# Altium PCB SPDIF_I2S_SPDIF_04-20-23.PcbDoc (part 1 of 2)
Units mil, origin at the board's own origin, x right, y up, seen from the top; angles counter-clockwise.
Board outline 3987 x 3094 mil, 2 copper layers (Top Layer, Bottom Layer); 173 components, 89 nets, 568 pads, 369 vias.
Unrouted connection lines stored in the file: 53.
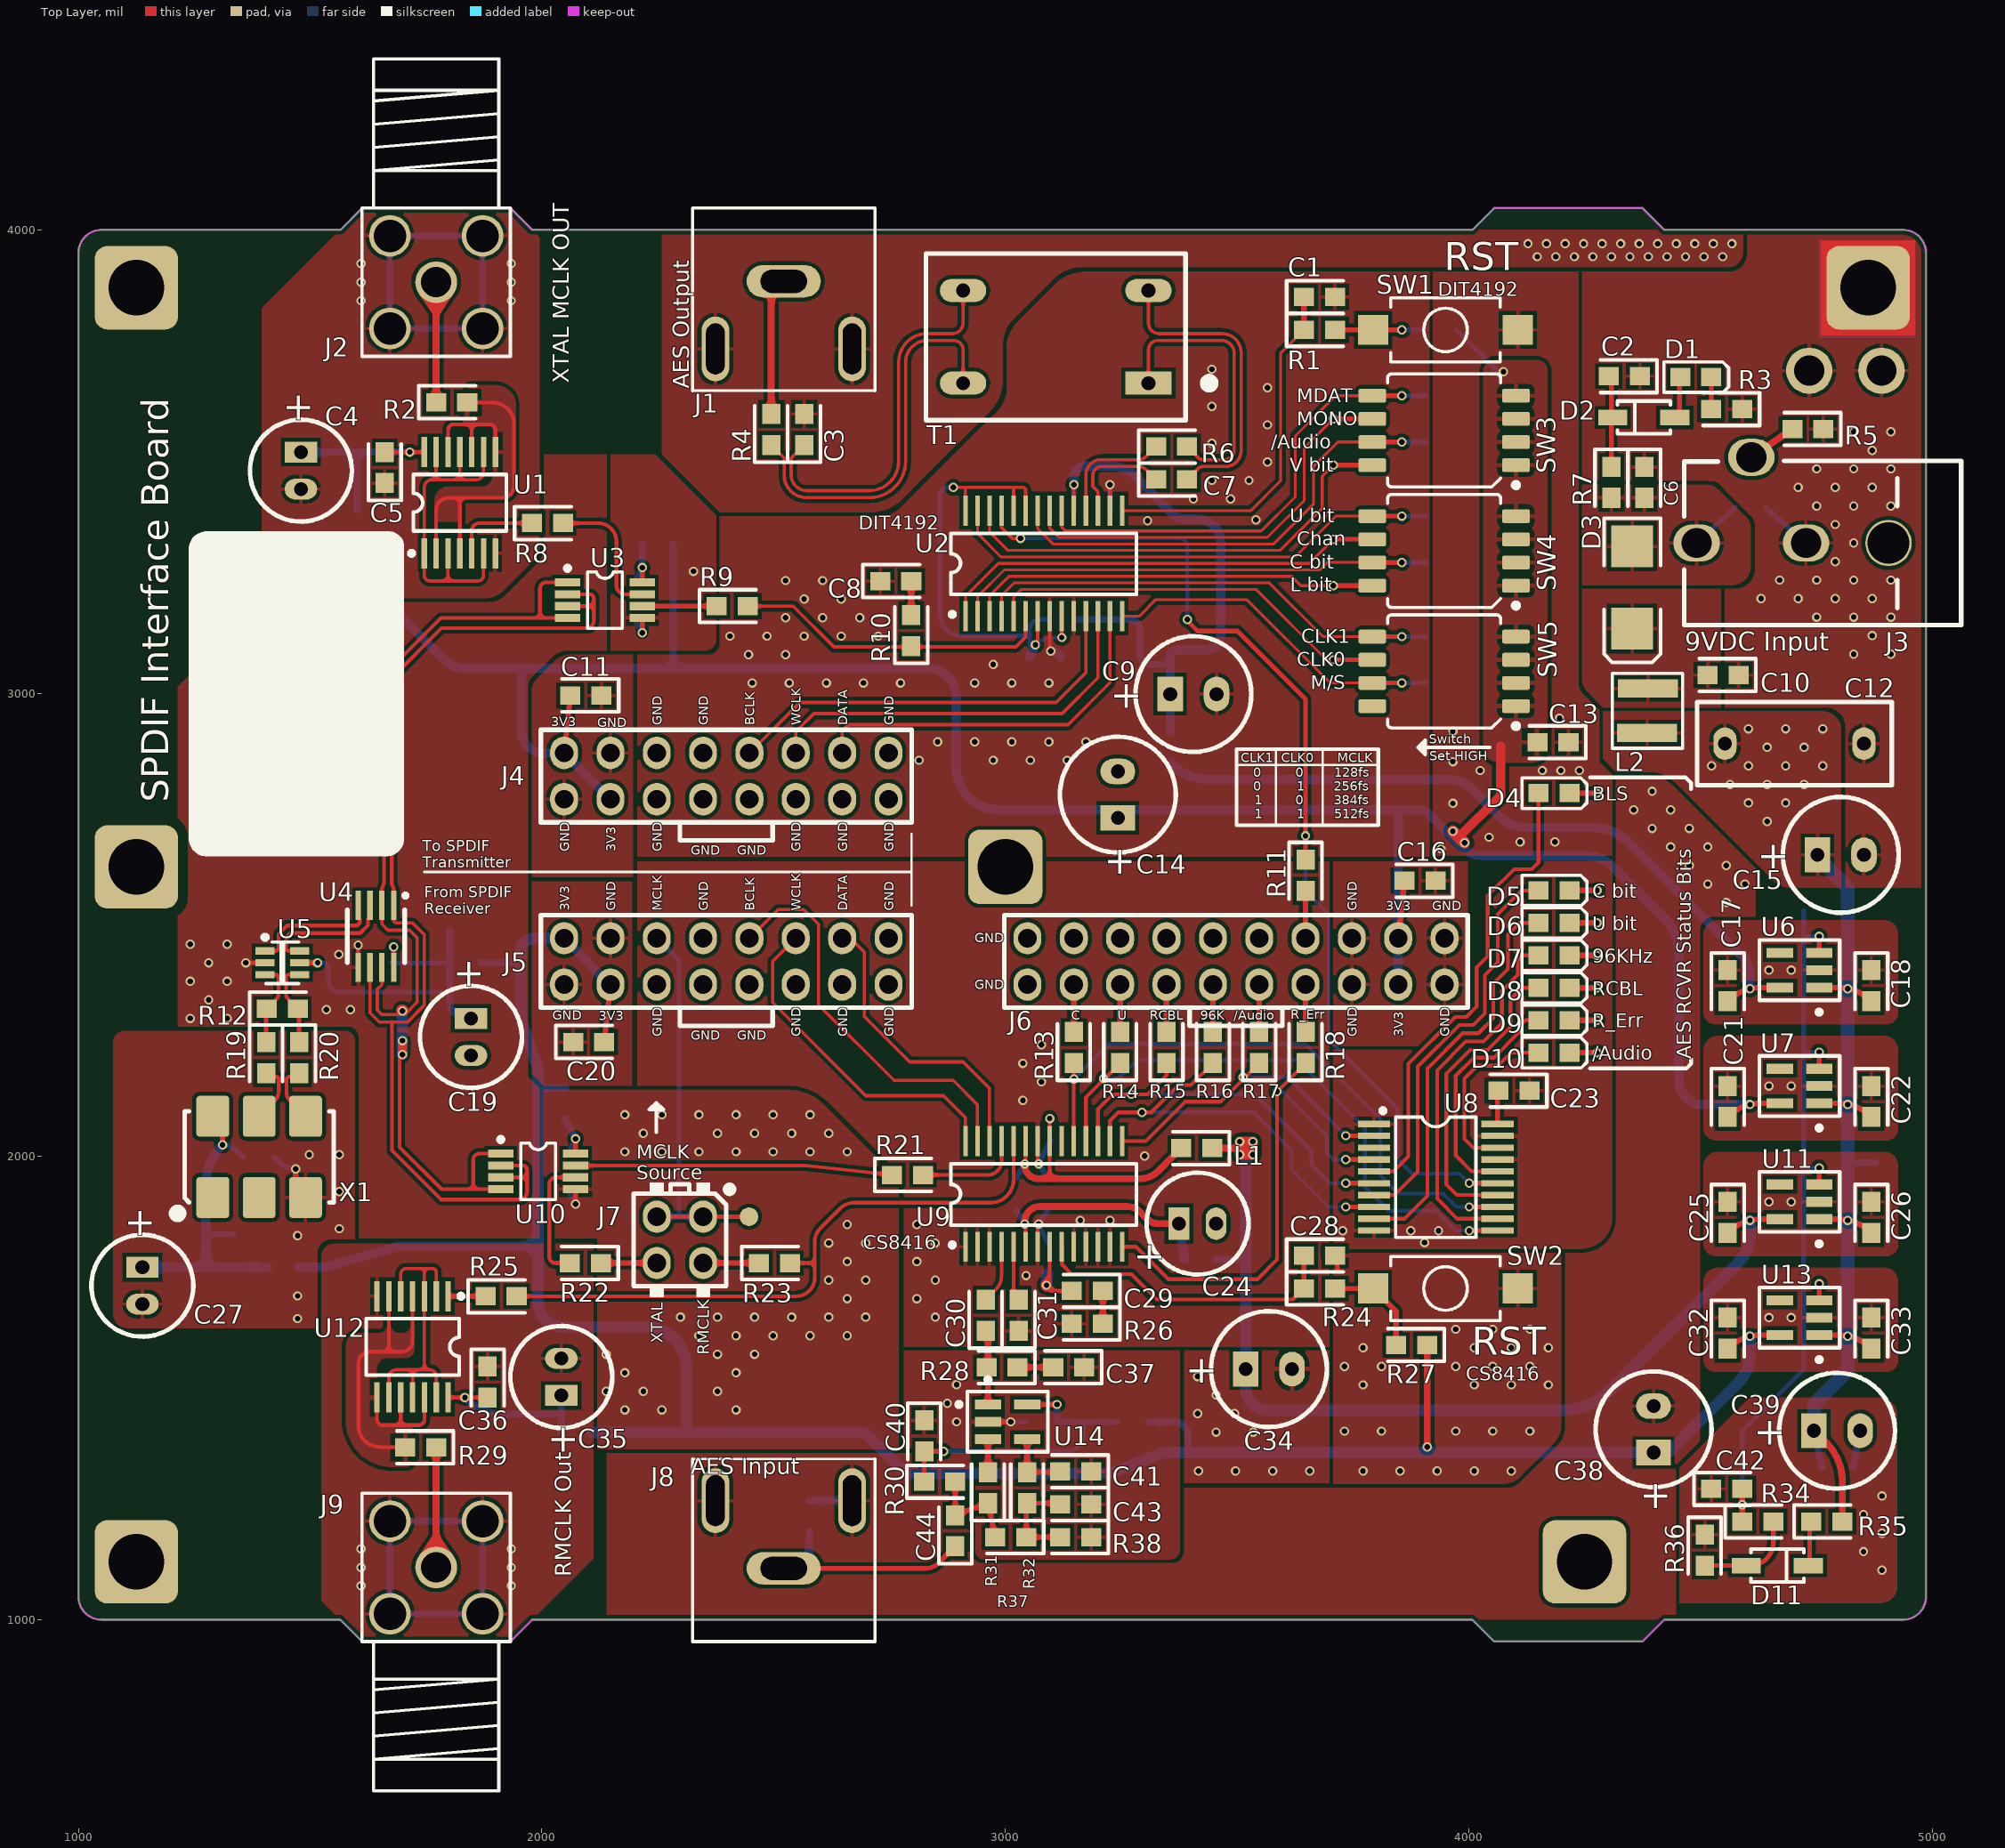
[diagram p0: Top Layer view]
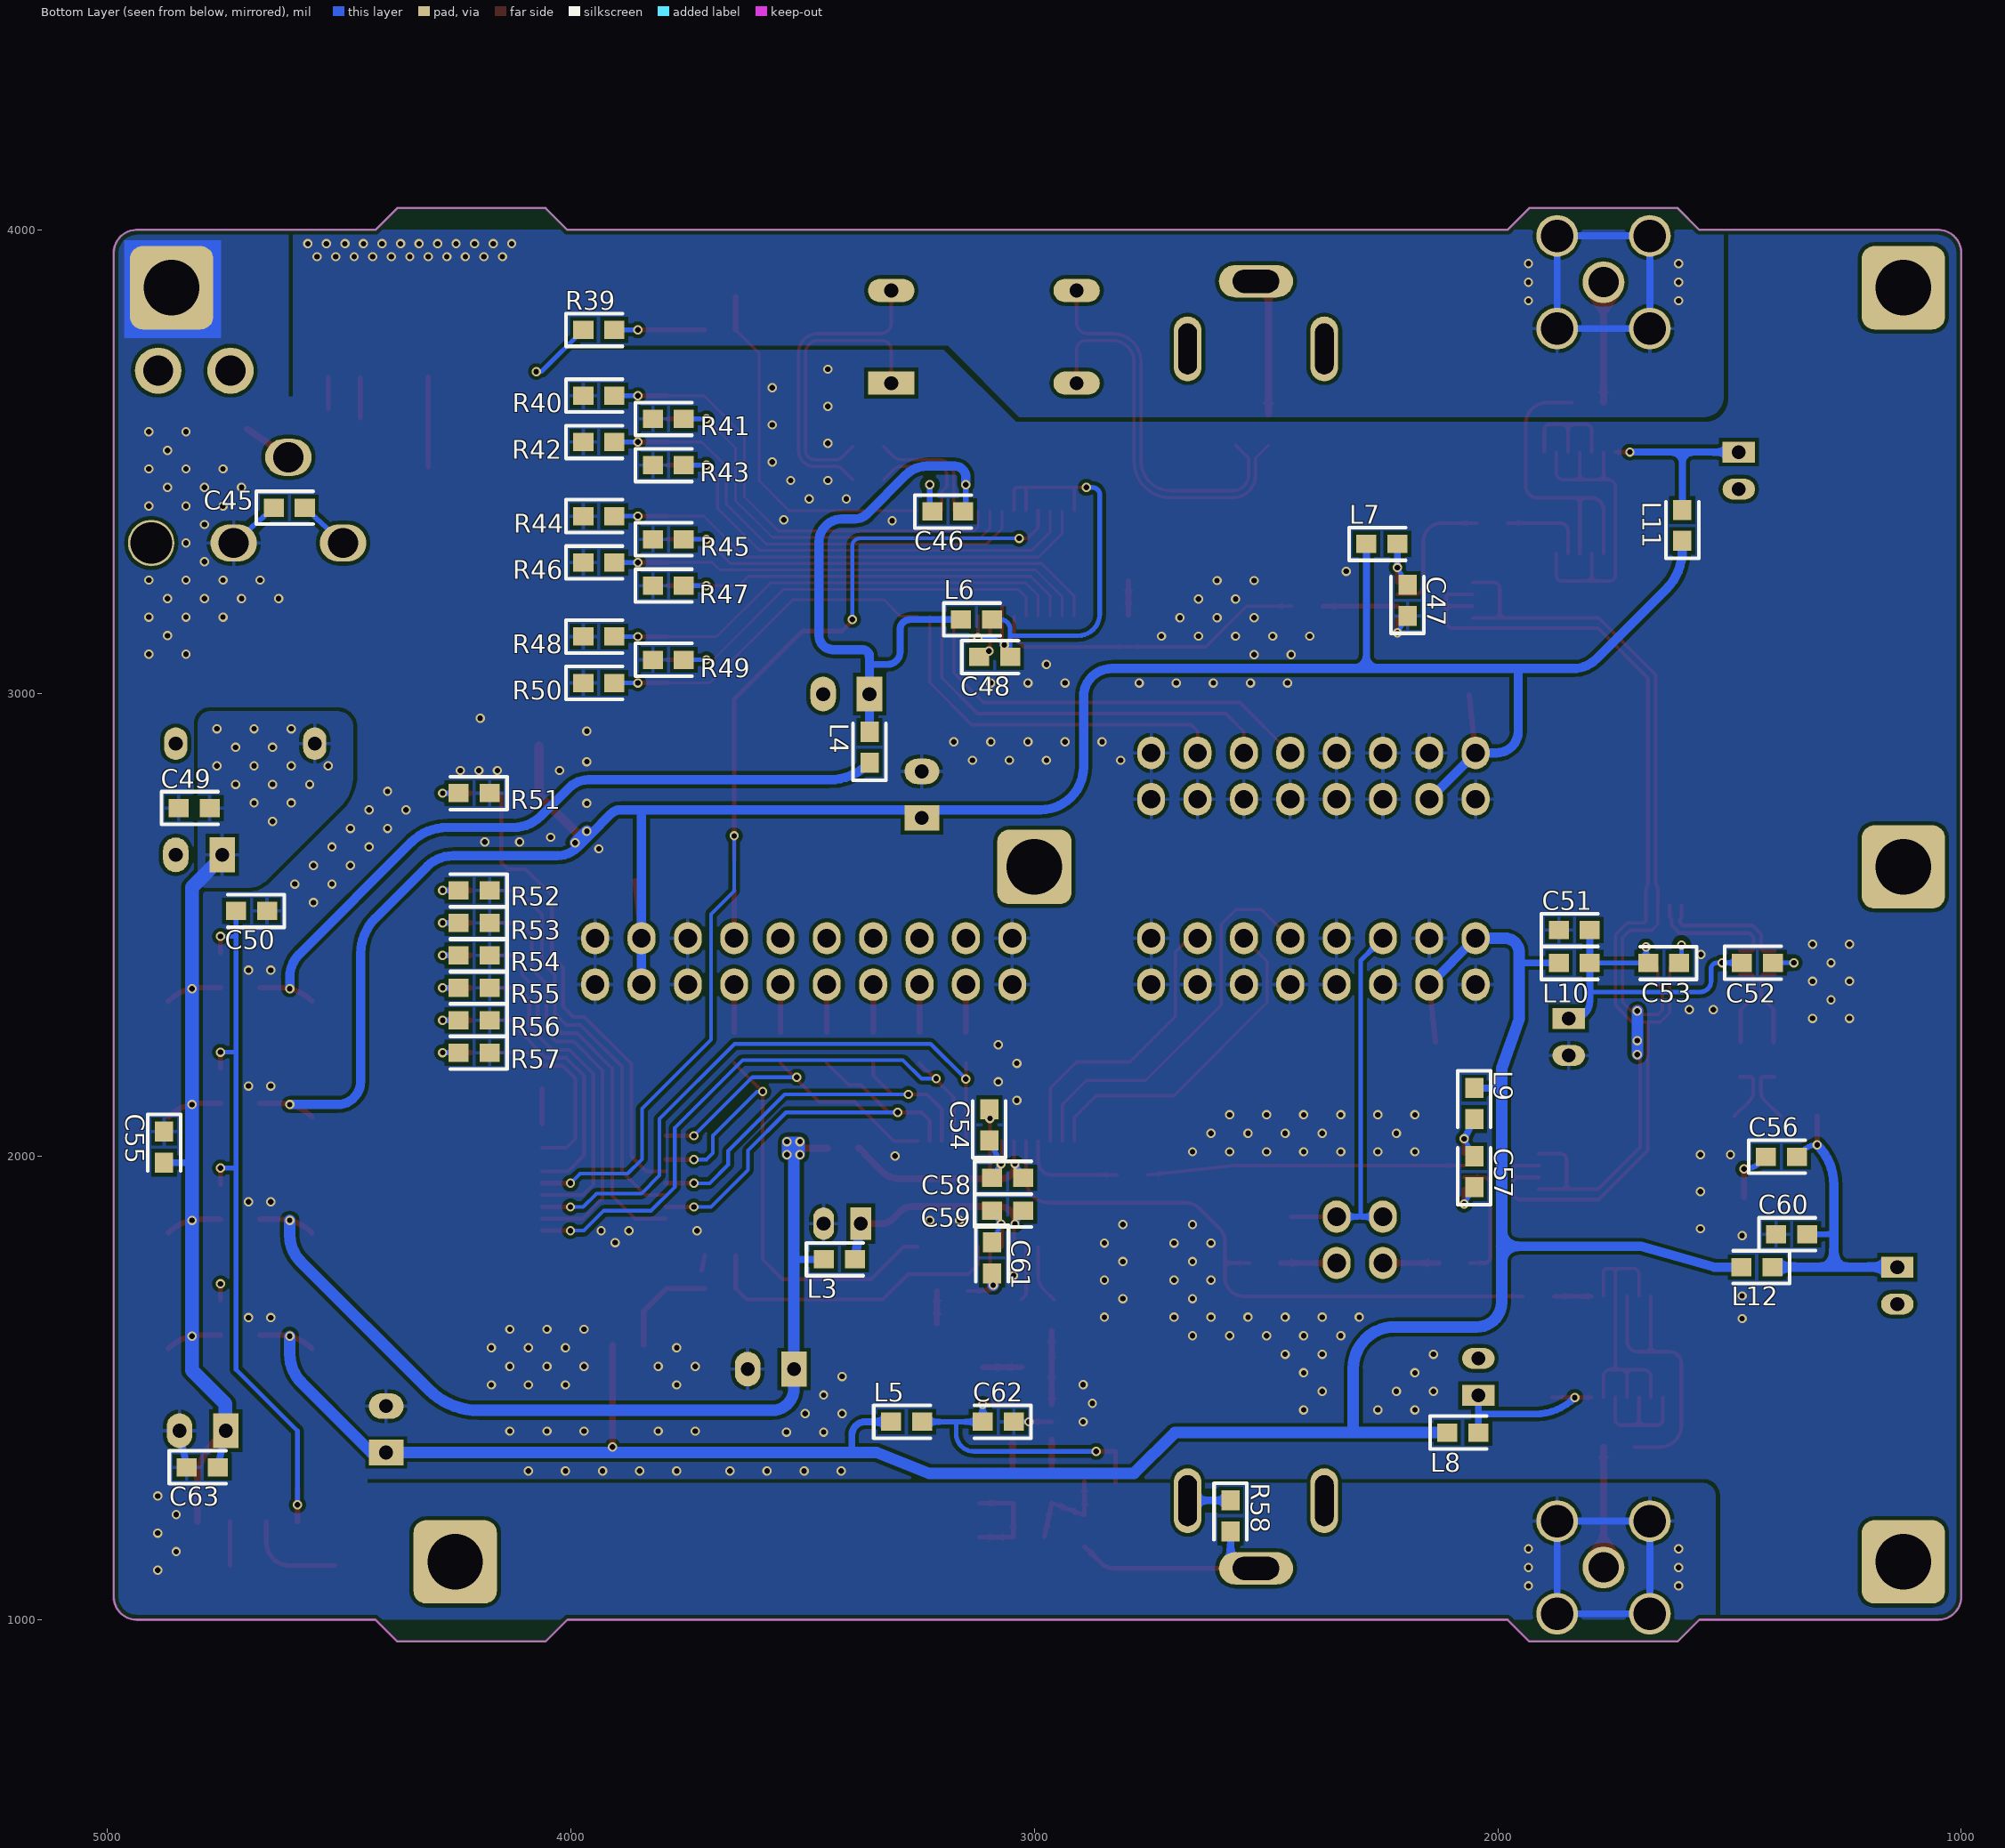
[diagram p1: Bottom Layer view, seen from below]

## Layer stack, top to bottom
Top Solder: solder mask 0.4, Solder Resist, Dk 3.5
Top Layer: signal copper 1.4
Dielectric 1: dielectric 12.6, FR-4, Dk 4.8
Bottom Layer: signal copper 1.4
Bottom Solder: solder mask 0.4, Solder Resist, Dk 3.5

## Board outline
1050,1000 1565,1000 1612,953 1932,953 1979,1000 4008,1000 4055,953 4375,953 4422,1000 4937,1000 ccw(c4937,1050) 4987,1050 4987,3950 ccw(c4937,3950) 4937,4000 4422,4000 4375,4047 4055,4047 4008,4000 1979,4000 1932,4047 1612,4047 1565,4000 1050,4000 ccw(c1050,3950) 1000,3950 1000,1050 ccw(c1050,1050)

## Design rules (kind name [scope] priority, off if disabled: settings)
Clearance [All] p1: gap=8 ignorepadtopadclearanceinfootprint=FALSE except(0: Arc-Hole Track-Hole SMDPad-Hole THPad-Hole Via-Hole Fill-Hole Poly-Hole Region-Hole Text-Hole)
ComponentClearance [All] p1 off: gap=10 collisioncheckmode=3 verticalgap=10 showdistances=FALSE
Height [All] p1 off: minheight=0 maxheight=1000 prefheight=500
PolygonConnect PolygonConnect_GND [isvia and InNet('GND') vs IsPolygon and InNet('GND')] p1: connectstyle=Direct reliefconductorwidth=10 reliefentries=4 polygonreliefangle="90 Angle" airgapwidth=10
PolygonConnect PolygonConnect_3.3V [IsVia and InNet('3.3V') vs IsPolygon and InNet('3.3V')] p2: connectstyle=Direct reliefconductorwidth=10 reliefentries=4 polygonreliefangle="90 Angle" airgapwidth=10
PolygonConnect PolygonConnect_pwr_input_v+ [IsVia and InNet('PWR_Input_V+') vs IsPolygon and InNet('PWR_Input_V+')] p3: connectstyle=Direct reliefconductorwidth=10 reliefentries=4 polygonreliefangle="90 Angle" airgapwidth=10
PolygonConnect [All] p4: connectstyle=Relief reliefconductorwidth=8 reliefentries=4 polygonreliefangle="90 Angle" airgapwidth=8
RoutingVias [All] p1: holewidth=12 width=20 viastyle="Through Hole" minholewidth=5 minwidth=10 maxholewidth=100 maxwidth=50
SolderMaskExpansion [All] p1: expansion=4 istentingtop=FALSE
Width [All] p1: maxlimit=100 minlimit=6 preferedwidth=8
28 further rules are at their usual default settings.

## Components (designator, comment, footprint, x,y, rotation, side; value= is the part's Value field where it differs from the comment)
C1 "C0603C104K3RAC7867" "PAD 0603" 3678,3855 r180 top
C2 "C0603C105K4RACTU" "PAD 0603" 4336,3684 r0 top
C3 "C0603C105K4RACTU" "PAD 0603" 2566,3569 r270 top
C4 "MAL214250479E3" "CAP .2\" X .08\" PITCH" 1480,3480.25 r270 top
C5 "C0603C104K3RAC7867" "PAD 0603" 1661,3486.79 r270 top
C6 "C0603C105K4RACTU" "PAD 0603" 4379,3455 r90 top
C7 "C0603C105K4RACTU" "PAD 0603" 3359,3461 r180 top
C8 "C0603C103J3GAC7411" "PAD 0603" 2763.74,3241.8 r180 top
C9 "MAL214250101E3" "CAP .25D x .1P" 3406,2998 r180 top
C10 "C0603C105K4RACTU" "PAD 0603" 4549,3039 r0 top
C11 "C0603C104K3RAC7867" "PAD 0603" 2095,2995 r0 top
C12 "MKP4F031002D00JSSD" "Cap Wima MKP4 .1uF 7.5mmP" 4703,2891 r0 top
C13 "C0603C105K4RACTU" "PAD 0603" 4182,2894 r0 top
C14 "MAL214250101E3" "CAP .25D x .1P" 3243,2781 r270 top
C15 "MAL214250101E3" "CAP .25D x .1P" 4803,2651 r180 top
C16 "C0603C104K3RAC7867" "PAD 0603" 3895,2595 r0 top
C17 "C0603C104K3RAC7867" "PAD 0603" 4559,2368.54 r90 top
C18 "C0603C104K3RAC7867" "PAD 0603" 4869,2368.54 r90 top
C19 "MAL214250479E3" "CAP .2\" X .08\" PITCH" 1847,2258 r270 top
C20 "C0603C104K3RAC7867" "PAD 0603" 2101,2247 r180 top
C21 "C0603C104K3RAC7867" "PAD 0603" 4559,2118.54 r90 top
C22 "C0603C104K3RAC7867" "PAD 0603" 4869,2118.54 r90 top
C23 "C0603C104K3RAC7867" "PAD 0603" 4098,2142 r0 top
C24 "MAL214250479E3" "CAP .2\" X .08\" PITCH" 3415,1855 r0 top
C25 "C0603C104K3RAC7867" "PAD 0603" 4559,1868.54 r90 top
C26 "C0603C104K3RAC7867" "PAD 0603" 4869,1868.54 r90 top
C27 "MAL214250479E3" "CAP .2\" X .08\" PITCH" 1138,1721 r270 top
C28 "C0603C104K3RAC7867" "PAD 0603" 3678,1786 r180 top
C29 "C0603C223K5RAC" "PAD 0603" 3177,1709.68 r0 top
C30 "C0603C105K4RACTU" "PAD 0603" 2957.68,1657 r270 top
C31 "C0603C105K4RACTU" "PAD 0603" 3028.68,1657 r270 top
C32 "C0603C104K3RAC7867" "PAD 0603" 4559,1618.54 r90 top
C33 "C0603C104K3RAC7867" "PAD 0603" 4869,1618.54 r90 top
C34 "MAL214250101E3" "CAP .25D x .1P" 3569,1541 r180 top
C35 "MAL214250479E3" "CAP .2\" X .08\" PITCH" 2042,1524 r90 top
C36 "C0603C104K3RAC7867" "PAD 0603" 1883,1513.21 r90 top
C37 "C0603C105K4RACTU" "PAD 0603" 3137,1545 r0 top
C38 "MAL214250101E3" "CAP .25D x .1P" 4399,1411 r270 top
C39 "MAL214250101E3" "CAP .25D x .1P" 4795,1408 r180 top
C40 "C0603C105K4RACTU" "PAD 0603" 2825.07,1396.77 r90 top
C41 "C0603C104K3RAC7867" "PAD 0603" 3152,1320.32 r0 top
C42 "C0603C104K3RAC7867" "PAD 0603" 4557.07,1282.54 r180 top
C43 "C0603C103J3GAC7411" "PAD 0603" 3152,1249.32 r0 top
C44 "C0603C104K3RAC7867" "PAD 0603" 2892,1192 r270 top
C45 "C0603C104K3RAC7867" "PAD 0603" 4608,3400 r0 bottom
C46 "C0603C104K3RAC7867" "PAD 0603" 3187,3392 r0 bottom
C47 "C0603C104K3RAC7867" "PAD 0603" 2195,3200 r270 bottom
C48 "C0603C104K3RAC7867" "PAD 0603" 3086,3078 r0 bottom
C49 "C0603C104K3RAC7867" "PAD 0603" 4813,2752 r0 bottom
C50 "C0603C104K3RAC7867" "PAD 0603" 4689.53,2530 r180 bottom
C51 "C0603C105K4RACTU" "PAD 0603" 1835,2488.66 r0 bottom
C52 "C0603C104K3RAC7867" "PAD 0603" 1440,2418 r0 bottom
C53 "C0603C104K3RAC7867" "PAD 0603" 1642,2417.66 r180 bottom
C54 "C0603C104K3RAC7867" "PAD 0603" 3097.47,2068 r270 bottom
C55 "C0603C105K4RACTU" "PAD 0603" 4878,2020 r90 bottom
C56 "C0603C104K3RAC7867" "PAD 0603" 1388,1999.46 r0 bottom
C57 "C0603C104K3RAC7867" "PAD 0603" 2051,1967 r270 bottom
C58 "C0603C104K3RAC7867" "PAD 0603" 3058,1954 r0 bottom
C59 "C0603C104K3RAC7867" "PAD 0603" 3058,1883 r0 bottom
C60 "C0603C105K4RACTU" "PAD 0603" 1366,1832 r0 bottom
C61 "C0603C102J5GAC7411" "PAD 0603" 3091.47,1781 r90 bottom
C62 "C0603C104K3RAC7867" "PAD 0603" 3078,1427.29 r180 bottom
C63 "C0603C105K4RACTU" "PAD 0603" 4796,1329 r0 bottom
D1 "HSMS-C191" "LED PAD 0603" 4490.07,3682 r180 top
D2 "MMSZ5228BT1G" SOD-123 4378,3595 r0 top
D3 "VS-4EGH06-M3/5BT" "DIODE SMB" 4353,3228 r270 top
D4 "HSMS-C191" "LED PAD 0603" 4184,2784 r180 top
D5 "HSMS-C191" "LED PAD 0603" 4184,2574 r180 top
D6 "HSMS-C191" "LED PAD 0603" 4184,2504 r180 top
D7 "HSMS-C191" "LED PAD 0603" 4184,2434 r180 top
D8 "HSMS-C191" "LED PAD 0603" 4184,2364 r180 top
D9 "HSMS-C191" "LED PAD 0603" 4184,2294 r180 top
D10 "HSMS-C191" "LED PAD 0603" 4184,2224 r180 top
D11 "MMSZ5228BT1G" SOD-123 4666,1117 r180 top
J1 "PJRAN1X1U04X" "CONNECTOR RCA Switchcraft PJRAN1X1U Series" 2522,3743 r180 top
J2 "132225" "CONNECTOR SMA" 1772,3887 r0 top
J3 "PJ-059AH" "CUI Locking Power Connector" 4906,3324 r180 top
J4 "10-89-7160" "2x8 header 2.54mm pitch" 2398,2821 r180 top
J5 "10-89-7160" "2x8 header 2.54mm pitch" 2398,2421 r180 top
J6 "10-89-7222" "2x10 header 2.54mm pitch - duplicate1 - duplicate" 3498,2421 r180 top
J7 "10-89-7040" "2x2 header 2.54mm pitch" 2298,1820 r0 top
J8 "PJRAN1X1U04X" "CONNECTOR RCA Switchcraft PJRAN1X1U Series" 2522,1257 r0 top
J9 "132225" "CONNECTOR SMA" 1772,1113 r180 top
L1 "BLE18PK100SN1D" "PAD 0603" 3413,2018 r0 top
L2 "VLS3012HBX-220M" "Inductor SMD 3x3" 4386,2962 r90 top
L3 "BLE18PK100SN1D" "PAD 0603" 3421,1778 r0 bottom
L4 "BLE18PK100SN1D" "PAD 0603" 3356,2883 r270 bottom
L5 "BLE18PK100SN1D" "PAD 0603" 3276,1427.29 r0 bottom
L6 "BLE18PK100SN1D" "PAD 0603" 3125,3159 r0 bottom
L7 "BLE18PK100SN1D" "PAD 0603" 2250.17,3322 r0 bottom
L8 "BLE18PK100SN1D" "PAD 0603" 2075.47,1404 r0 bottom
L9 "BLE18PK100SN1D" "PAD 0603" 2051,2114 r90 bottom
L10 "BLE18PK100SN1D" "PAD 0603" 1835,2417.66 r0 bottom
L11 "BLE18PK100SN1D" "PAD 0603" 1602,3362 r270 bottom
L12 "BLE18PK100SN1D" "PAD 0603" 1441,1761 r180 bottom
R1 "1k" "PAD 0603" 3678,3784 r180 top
R2 "4R99" "PAD 0603" 1805.46,3627.8 r180 top
R3 "470R" "PAD 0603" 4557,3613 r0 top
R4 "4R99" "PAD 0603" 2495,3569 r270 top
R5 "10K" "PAD 0603" 4732,3570 r0 top
R6 "10R" "PAD 0603" 3359,3532 r180 top
R7 "100R" "PAD 0603" 4308,3455 r90 top
R8 "4R99" "PAD 0603" 2012,3367 r180 top
R9 "4R99" "PAD 0603" 2411,3187.8 r180 top
R10 "470R" "PAD 0603" 2797.2,3135 r270 top
R11 "100R" "PAD 0603" 3648,2607 r90 top
R12 "90R9" "PAD 0603" 1440,2319 r180 top
R13 "100R" "PAD 0603" 3148,2235 r270 top
R14 "100R" "PAD 0603" 3248,2235 r270 top
R15 "100R" "PAD 0603" 3348,2235 r270 top
R16 "100R" "PAD 0603" 3448,2235 r270 top
R17 "100R" "PAD 0603" 3548,2235 r270 top
R18 "100R" "PAD 0603" 3648,2235 r270 top
R19 "4R99" "PAD 0603" 1405,2213 r90 top
R20 "4R99" "PAD 0603" 1476,2213 r90 top
R21 "4R99" "PAD 0603" 2789,1960 r180 top
R22 "4R99" "PAD 0603" 2094,1770 r0 top
R23 "4R99" "PAD 0603" 2502,1770 r180 top
R24 "1k" "PAD 0603" 3678,1715 r180 top
R25 "4R99" "PAD 0603" 1912,1698.25 r180 top
R26 "3K" "PAD 0603" 3177,1639 r0 top
R27 "4.7k" "PAD 0603" 3877,1593 r0 top
R28 "1k" "PAD 0603" 2993,1545 r0 top
R29 "4R99" "PAD 0603" 1738.54,1372.2 r0 top
R30 "10K" "PAD 0603" 2858.53,1298 r180 top
R31 "10R" "PAD 0603" 2962.68,1285 r270 top
R32 "100R" "PAD 0603" 3047.32,1285 r270 top
R34 "470R" "PAD 0603" 4624,1212 r180 top
R35 "3.3K" "PAD 0603" 4773,1212 r180 top
R36 "4.99K" "PAD 0603" 4509.53,1150.46 r90 top
R37 "2.4K" "PAD 0603" 3012,1178.32 r0 top
R38 "3.3K" "PAD 0603" 3152,1178.32 r0 top
R39 "4.7k" "PAD 0603" 3940,3784 r0 bottom
R40 "4.7k" "PAD 0603" 3940,3642 r0 bottom
R41 "4.7k" "PAD 0603" 3790,3592 r0 bottom
R42 "4.7k" "PAD 0603" 3940,3542 r0 bottom
R43 "4.7k" "PAD 0603" 3790,3492 r0 bottom
R44 "4.7k" "PAD 0603" 3940,3382 r0 bottom
R45 "4.7k" "PAD 0603" 3790,3332 r0 bottom
R46 "4.7k" "PAD 0603" 3940,3282 r0 bottom
R47 "4.7k" "PAD 0603" 3790,3232 r0 bottom
R48 "4.7k" "PAD 0603" 3940,3122 r0 bottom
R49 "4.7k" "PAD 0603" 3790,3072 r0 bottom
R50 "4.7k" "PAD 0603" 3940,3022 r0 bottom
R51 "470R" "PAD 0603" 4209,2784 r180 bottom
R52 "470R" "PAD 0603" 4209,2574 r180 bottom
R53 "470R" "PAD 0603" 4209,2504 r180 bottom
R54 "470R" "PAD 0603" 4209,2434 r180 bottom
R55 "470R" "PAD 0603" 4209,2364 r180 bottom
R56 "470R" "PAD 0603" 4209,2294 r180 bottom
R57 "470R" "PAD 0603" 4209,2224 r180 bottom
R58 "82R" "PAD 0603" 2577,1224 r90 bottom
SW1 "ADTSML31YB" "Switch Tactile ADTSML3" 3950,3784 r0 top
SW2 "ADTSML31YB" "Switch Tactile ADTSML3" 3950,1715 r0 top
SW3 "GDH04STR04" "Switch DIP SMD TE Conn GDH04STR04" 3947,3567 r90 top
SW4 "GDH04STR04" "Switch DIP SMD TE Conn GDH04STR04" 3947,3307 r90 top
SW5 "GDH04STR04" "Switch DIP SMD TE Conn GDH04STR04" 3947,3047 r90 top
T1 "PE-65612NL" "SPDIF Transformer" 3109,3769 r180 top
U1 "74AHCV17APWJ" "TSSOP 14" 1823,3411 r0 top
U2 "DIT4192" "TSSOP 28"#1 3083,3280 r0 top
U3 "SN65EPT23DGK/DGKR" "MSOP 8" 2136,3200.59 r0 top
U4 "MAX9381EUA+" "SSOP 8 custom" 1642,2475 r180 top
U5 "TLV3604" SC70-6 1440,2418 r0 top
U6 "MIC5216-3.3YM5-TR" SOT23-5 4714,2402 r90 top
U7 "MIC5216-3.3YM5-TR" SOT23-5 4714,2152 r90 top
U8 "SN74LVCH244APWR" TSSOP20 3929,1955 r0 top
U9 "CS8416-DZZ" "TSSOP 28"#2 3083,1919 r0 top
U10 "SN65EPT23DGK" "MSOP 8" 1992,1967.59 r0 top
U11 "MIC5216-3.3YM5-TR" SOT23-5 4714,1902 r90 top
U12 "74AHCV17APWJ" "TSSOP 14" 1721,1589 r180 top
U13 "MIC5216-3.3YM5-TR" SOT23-5 4714,1652 r90 top
U14 "LMV7219M5" LMV7219M5 3005,1427 r0 top
X1 "XLL736049.152000X" "XTAL 5 x 7  six pads" 1390,1999 r0 top

## Footprints (in the part's own frame and the unit in brackets; to place one, negate y for a bottom-side part, rotate by r counter-clockwise, add the part's x,y. Pads: shape width x height; smd on the part's side, far side on the other; paste and mask are expansions set on the pad)
"2x2 header 2.54mm pitch" [mil]
  oval 60x70 hole 40: 1(50,50) 2(50,-50) 3(-50,50) 4(-50,-50)
  silkscreen extent -100,-100 114,120
"2x8 header 2.54mm pitch" [mil]
  oval 60x70 hole 40: 1(350,50) 2(350,-50) 3(250,50) 4(250,-50) 5(150,50) 6(150,-50) 7(50,50) 8(50,-50) 9(-50,50) 10(-50,-50) 11(-150,50) 12(-150,-50) 13(-250,50) 14(-250,-50) 15(-350,50) 16(-350,-50)
  silkscreen extent -400,-100 400,139
"2x10 header 2.54mm pitch - duplicate1 - duplicate" [mil]
  oval 60x70 hole 40: 1(450,50) 2(450,-50) 3(350,50) 4(350,-50) 5(250,50) 6(250,-50) 7(150,50) 8(150,-50) 9(50,50) 10(50,-50) 11(-50,50) 12(-50,-50) 13(-150,50) 14(-150,-50) 15(-250,50) 16(-250,-50) 17(-350,50) 18(-350,-50) 19(-450,50) 20(-450,-50)
  silkscreen extent -500,-100 500,139
"CAP .2\" X .08\" PITCH" [mil]
  rect 45x70 hole 30: 1(-40,0)
  oval 45x70 hole 30: 2(40,0)
  silkscreen extent -110,-110 110,110
"CAP .25D x .1P" [mil]
  rect 55x75 hole 30: 1(50,0)
  oval 55x75 hole 30: 2(-50,0)
  silkscreen extent -125,-125 125,125
"Cap Wima MKP4 .1uF 7.5mmP" [mil] "Wima .1uF MKP4 4.5mmW x 10.mmL x 7.5mmP"
  oval 50x70 hole 30: 1(-150,0) 2(150,0)
  silkscreen extent -210,-90 210,90
"CONNECTOR RCA Switchcraft PJRAN1X1U Series" [mil] "Switchcraft PJRAN1X1U Series single RCA right-angle PCB connector"
  oval 160x70 hole 50 slot 100 at 0 deg: 1(0,-146)
  oval 60x140 hole 40 slot 110 at 90 deg: 2(-147.5,0) 3(147.5,0)
  silkscreen extent -197,-304 197,90
"CONNECTOR SMA" [mil] "Linx Right Angle SMA Connector CONREVSMA002-G"
  round 90 hole 65: 1(0,0)
  round 90 hole 70: 2(-100,-100) 2(-100,100) 2(100,-100) 2(100,100)
  silkscreen extent -160,-160 160,482
"CUI Locking Power Connector" [mil] "CUI PJ-059AH"
  round 100 hole 90: 0(0,0)
  oval 100x80 hole 65: 1(414,0) 2(178,0) 3(296,-185)
  silkscreen extent -157,-177 441,177
"DIODE SMB" [mm] "DO-214-AA/SMB; 2 C-Bend Leads; Body 5.3 x 3.6 mm, inc. leads (LxW)"
  rect 2.3x2.3 smd: 1(-2.25,0) 2(2.25,0)
  silkscreen extent -3.8,-1.55 4.1,1.55
"Inductor SMD 3x3" [mil] "Wurth 33µH 3mmx3mm"
  rect 40x130 smd: 1(-48,1) 2(48,-1)
  silkscreen extent -81,-76 81,76
"LED PAD 0603" [mm]
  rect 1.1x1 smd: 1(0.85,0) 2(-0.85,0)
  silkscreen extent -1.8,-0.84 1.75,0.84
LMV7219M5 [mm] "Comparator"
  rect 1.45x0.55 smd: "1 Out"(-1.075,0.957) "2 V-"(-1.075,0.007) "3 In+"(-1.075,-0.943) "4 In-"(1.075,-0.943) "5 V+"(1.075,0.957)
  silkscreen extent -2.2,-1.64 2.2,2.43
"MSOP 8" [mm] "TSOP, 8-Leads, Body 3x3mm, Pitch 0.65mm, IPC High Density"
  rect 1.4x0.45 smd: "1 D0"(-2.05,0.975) "2 /D0"(-2.05,0.325) "3 /D1"(-2.05,-0.325) "4 D1"(-2.05,-0.975) "5 GND"(2.05,-0.975) "6 Q1"(2.05,-0.325) "7 Q0"(2.05,0.325) "8 Vcc"(2.05,0.975)
  silkscreen extent -2.17,-1.55 0.95,1.87
"PAD 0603" [mm]
  rect 1.1x1 smd: 1(0.85,0) 2(-0.85,0)
  silkscreen extent -1.3,-0.9 1.8,0.9
SC70-6 [mm] "SOT363, 6-Leads, Body 2x1.3mm, Pitch 0.65mm, Lead Span 2.1mm, IPC Low Density"
  rect 1.05x0.4 smd: "1 Out+"(-0.95,0.65) "2 Vee"(-0.95,0) "3 In+"(-0.95,-0.65) "4 In-"(0.95,-0.65) "5 Vcc"(0.95,0) "6 Out-"(0.95,0.65)
  silkscreen extent -1.07,-1.14 0.89,1.52
SOD-123 [mm] "SOD-123; 2 Leads; Body 2.7 x 1.6 mm, (LxW)"
  rect 1.6x0.85 smd: 1(-1.7,0) 2(1.7,0)
  silkscreen extent -1.45,-0.9 1.45,0.9
SOT23-5 [mm]
  rect 0.55x1.45 smd: "1 In"(-0.95,-1.075) "2 GND"(0,-1.075) "3 EN"(0.95,-1.075) "4 FLG"(0.95,1.075) "5 Out"(-0.95,1.075)
  silkscreen extent -2.42,-2.2 1.65,2.2
"SPDIF Transformer" [mil] "PE-65612 by Pulse Electronics [Pins 1 and 3 are inphase, 1 is primary]"
  rect 100x50 hole 30: 1(-200,100)
  oval 100x50 hole 30: 2(-200,-100) 3(200,100) 4(200,-100)
  silkscreen extent -341,-180 280,180
"SSOP 8 custom" [mil] "Custom for TI SSOP single Flip Flop (SM8)"
  rect 11.8x62.9 smd: "1 D"(-38.38,-66.9) "2 /D"(-12.79,-66.9) "3 CLK"(12.79,-66.9) "4 /CLK"(38.37,-66.9) "5 Vee"(38.37,66.9) "6 /Q"(12.79,66.9) "7 Q"(-12.79,66.9) "8 Vcc"(-38.38,66.9)
  silkscreen extent -67,-92 62,57, body extent -61,-61 61,61, height 43
"Switch DIP SMD TE Conn GDH04STR04" [mil] "TE Connectivity GDH04STR04 1.27mm pitch"
  rrect30% 30x60 smd: 1(-75,-155) 2(-25,-155) 3(25,-155) 4(75,-155) 5(75,155) 6(25,155) 7(-25,155) 8(-75,155)
  silkscreen extent -123,-160 122,122
"Switch Tactile ADTSML3" [mil] "APEM ADTSML3"
  rect 65x65 smd: 1(-156,0) 2(156,0)
  silkscreen extent -118,-69 118,69
TSSOP20 [mm] "TSOP, 20-Leads, Body 6.5x4.4mm, Pitch 0.65mm, IPC Low Density"
  rect 1.778x0.35 smd: "1 /OE_1"(-3.383,2.925) "2 1A1"(-3.383,2.275) "3 2Y4"(-3.383,1.625) "4 1A2"(-3.383,0.975) "5 2Y3"(-3.383,0.325) "6 1A3"(-3.383,-0.325) "7 2Y2"(-3.383,-0.975) "8 1A4"(-3.383,-1.625) "9 2Y1"(-3.383,-2.275) "10 GND"(-3.383,-2.925) "11 2A1"(3.383,-2.925) "12 1Y4"(3.383,-2.275) "13 2A2"(3.383,-1.625) "14 1Y3"(3.383,-0.975) "15 2A3"(3.383,-0.325) "16 1Y2"(3.383,0.325) "17 2A4"(3.383,0.975) "18 1Y1"(3.383,1.625) "19 /OE_2"(3.383,2.275) "20 Vcc"(3.383,2.925)
  silkscreen extent -3.02,-3.3 2.2,3.77
"TSSOP 14" [mm]
  rect 0.3x1.65 smd: "1 1A"(-1.95,-2.775) "2 1Y"(-1.3,-2.775) "3 2A"(-0.65,-2.775) "4 2Y"(0,-2.775) "5 3A"(0.65,-2.775) "6 3Y"(1.3,-2.775) "7 GND"(1.95,-2.775) "8 4Y"(1.95,2.775) "9 4A"(1.3,2.775) "10 5Y"(0.65,2.775) "11 5A"(0,2.775) "12 6Y"(-0.65,2.775) "13 6A"(-1.3,2.775) "14 Vcc"(-1.95,2.775)
  silkscreen extent -2.77,-2.9 2.55,1.55
"TSSOP 28"#1 [mil]
  rect 9.84x64.96 smd: "1 CSS"(-169,-114) "2 COPY/C"(-143,-114) "3 L"(-117,-114) "4 CLK1"(-91,-114) "5 CLKJ0"(-65,-114) "6 MCLK"(-39,-114) "7 Vio"(-13,-114) "8 DGND"(13,-114) "9 FMT0"(39,-114) "10 FMT1"(65,-114) "11 SCLK"(91,-114) "12 SYNC"(117,-114) "13 DATA"(143,-114) "14 M/S"(169,-114) "15 /RST"(169,114) "16 DGND"(143,114) "17 TX-"(117,114) "18 TX+"(91,114) "19 Vdd"(65,114) "20 MDAT"(39,114) "21 MONO"(13,114) "22 /Audio"(-13,114) "23 /Emph"(-39,114) "24 BLSM"(-65,114) "26 V"(-117,114) "27 U"(-143,114) "28 Mode"(-169,114) "52 BLS"(-91,114)
  silkscreen extent -202,-115 200,65
"TSSOP 28"#2 [mil]
  rect 9.84x64.96 smd: "1 RXP3"(-169,-114) "2 RXP2"(-143,-114) "3 RXP1"(-117,-114) "4 RXP0"(-91,-114) "5 RXN"(-65,-114) "6 VA"(-39,-114) "7 AGND"(-13,-114) "8 FILT"(13,-114) "9 /RST"(39,-114) "10 RXP4"(65,-114) "11 RXP5"(91,-114) "12 RXP6"(117,-114) "13 RXP7"(143,-114) "14 AD0 /CS"(169,-114) "15 AD1 CDIn"(169,114) "16 SCL CCLK"(143,114) "17 SDA CDOut"(117,114) "18 AD2 GPO2"(91,114) "19 GPO1"(65,114) "20 GPO0"(39,114) "21 VL"(13,114) "22 DGND"(-13,114) "23 VD"(-39,114) "24 RMCK"(-65,114) "25 OMCK"(-91,114) "26 SDOut"(-117,114) "27 OSCLK"(-143,114) "28 OLRCK"(-169,114)
  silkscreen extent -202,-115 200,65
"XTAL 5 x 7  six pads" [mm]
  rrect20% 1.8x2.254 smd: "1 EN"(-2.54,-2.227) "2 NC"(0,-2.227) "3 GND"(2.54,-2.227) "4 OUT"(2.54,2.227) "5 /OUT"(0,2.227) "6 Vdd"(-2.54,2.227)
  silkscreen extent -4.67,-3.3 4.09,2.5

## Free pads (board coordinates)
  rrect30% 180x180 hole 120: 0(1125,1125) 0(1125,2625) 0(1125,3875) 0(4250,1125) 0(4862,3875)
  rrect30% 160x160 hole 120: 0(3000,2625)
  round 100 hole 65: 1(4735,3696) 1(4891,3696)
  round 40 smd: 2(2447,1870)

## Via types
v1: diameter 20, hole 12, Top Layer to Bottom Layer, tented both sides, 364 vias
v2: diameter 20, hole 12, Top Layer to Bottom Layer, 5 vias

## Nets (pads, with @x,y where several pads share a name; then routed paths per layer and width w, separated by ;. In a path a pad name is that pad's centre, name@x,y a point inside that pad or via, vN(x,y) a via of type N, cw(c..) or ccw(c..) an arc to the next point about the centre after c; other vN are vias at no path point)
3.3V: "U1.14 Vcc" "U6.5 Out" "U7.5 Out" "U8.20 Vcc" "U9.21 VL" "U9.23 VD" "U11.5 Out" "U12.14 Vcc" "U13.5 Out" C4.1 C5.2 C11.2 C13.2 C14.1 C16.2 C17.2 C20.2 C21.2 C23.2 C25.2 C32.2 C34.1 C35.1 C36.2 C38.1 C54.2 C58.2 J4.2 J4.3 J5.2 J5.3 J6.17 J6.18 L1.1 L1.2 L3.1 L4.1 L5.1 L7.1 L8.1 L8.2 L9.1 L10.1 L11.1 L11.2 L12.2 R27.1 R39.1 SW3.1 SW3.2 SW3.3 SW3.4 SW4.1 SW4.2 SW4.3 SW4.4 SW5.1 SW5.2 SW5.3 SW5.4 | length 16842
  Top Layer w8: C5.2@1661,3520.25 v1(1715,3520.25) 1746.23,3520.25 ; 1797.77,1479.75 v1(1834,1479.75) C36.2@1883,1479.75 ; v2@3044,1984 3044,2033 ; 3096,1952 3096,2033 v2(3096,2082)
  Top Layer w10: v2@3042,1981 v2(3042,1984) ; 4062.17,2070.16 C23.2@4062.17,2146
  Top Layer w12: J4.2@2048,2871 C11.2@2061.53,2995 ; C20.2@2134.47,2247 J5.3@2148,2371 ; J6.18@3848,2471 C16.2@3861.53,2595 ; C32.2@4559,1585.07 cw(c4630.29,1513.78) 4630.29,1614.6 4671.68,1614.6 ; C25.2@4559,1835.07 cw(c4630.29,1763.78) 4630.29,1864.6 4671.68,1864.6 ; C21.2@4559,2085.07 cw(c4630.29,2013.78) 4630.29,2114.6 4671.68,2114.6 ; C17.2@4559,2335.07 cw(c4630.29,2263.78) 4630.29,2364.6 4671.68,2364.6
  Top Layer w15: v2@3042,1981 ccw(c3071,1981) 3071,1952 3096,1952 3291.61,1952 ccw(c3291.69,2004.75) 3329.03,1967.49 3365.38,2003.85 3365.38,2005.82 3377.57,2018 L1.2@3379.53,2018 ; L1.1@3446.47,2018 3506,2018 3519,2018 ; v1(3506,2004) v1(3534,2032) ; v1(3910.47,1373) R27.1@3910.47,1593
  Top Layer w20: 3980,2690 4069,2779 4069,2885
  Top Layer w22: v1(3506,2004) 3506,2018 v1(3506,2032) v1(3534,2032) v1(3534,2004) v1(3506,2004)
  Top Layer w25: v1(3966,2702) v1(3991,2677)
  Bottom Layer w10: v1(1834,1479.75) v1@1834.39,1479.36 ; R39.1@3973.47,3784 4063.47,3694 v1(4075,3694)
  Bottom Layer w12: C58.2@3024.53,1954 v2(3042,1984)
  Bottom Layer w15: C4.1@1480,3520.25 v1(1715,3520.25) ; 1578,3520 cw(c1578,3496) 1602,3496 ; L11.2@1602,3395.47 1602,3496 ; 1602,3520 1602,3496 ; 1626,3520 ccw(c1626,3496) 1602,3496 ; v1@1834.39,1479.36 ccw(c1919.75,1564.71) 1919.75,1444 2042,1444 ; L10.1@1868.46,2417.66 1954,2417.66 ; 1992,2147.47 L9.1@2051,2147.47 ; L8.2@2042,1404 2042,1444 ; C35.1@2042,1484 2042,1444 ; 2257,3055 ccw(c2257,3082) 2283.64,3077.6 ; 2283.64,3053 2283.64,3077.6 ; L7.1@2283.64,3322 2283.64,3077.6 ; 2311,3055 cw(c2311,3082) 2284,3082 cw(c2257,3082) 2283.64,3077.6 ; L5.1@3309.47,1427.29 3365.16,1427.29 cw(c3365.16,1398.45) 3394,1398.45 3394,1361 ; L3.1@3454.47,1778 3519,1778 ; v1(3506,2004) 3519,2017 v1(3534,2032)
  Bottom Layer w20: L12.2@1474.46,1761 1533,1761 1691,1806 1992,1806 ; L11.1@1602,3328.53 1602,3309 ccw(c1722.71,3309) 1637.36,3223.64 1786.39,3074.61 ccw(c1838.56,3126.77) 1838.56,3053 1956,3053 ; J5.2@2048,2471 J5.3@2148,2371 ; J4.3@2148,2771 J4.2@2048,2871 2003,2871 cw(c2003,2918) 1956,2918 1956,3053 ; L4.1@3356,2849.53 3357.18,2848.36 ccw(c3442.53,2933.71) 3442.53,2813 3962.1,2813 cw(c3962.1,2752.89) 4004.61,2795.39 4065.39,2734.61 ccw(c4124.8,2794.01) 4124.8,2710 4267.13,2710 cw(c4267.13,2599.26) 4345.44,2677.56 4585.86,2437.14 cw(c4534.82,2386.1) 4607,2386.1 v1(4607,2362) ; J6.17@3848,2371 J6.18@3848,2471 3848,2747 ; 3893,2748 3848,2748 3243,2748 2987.01,2748 cw(c2987.01,2841.01) 2894,2841.01 2894,2992.33 ccw(c2833.33,2992.33) 2833.33,3053 2283.64,3053 1956,3053 ; 3893.69,2748 cw(c3893.69,2720.69) 3912.99,2740.01 3958.5,2694.5 3983.5,2669.5 3985.1,2667.9 ccw(c4030.73,2713.53) 4030.73,2649 4254.44,2649 cw(c4254.44,2568.63) 4311.27,2625.46 4421.68,2515.05 cw(c4343.66,2437.03) 4454,2437.03 4454,2162 ccw(c4504,2162) 4504,2112 v1(4607,2112)
  Bottom Layer w22: v1(3506,2004) 3519,2004 v1(3534,2004) v1(3534,2032) v1(3506,2032) v1(3506,2004)
  Bottom Layer w25: J5.2@2048,2471 1985,2471 ccw(c1985,2440) 1954,2440 1954,2417.66 1954,2296 1992,2189 1992,2147.47 1992,1806 1992,1685 ccw(c2045,1685) 2045,1632 2223,1632 cw(c2223,1543) 2312,1543 2312,1404 ; L8.1@2108.93,1404 2312,1404 ; 3519,2018 3519,2017 3519,2004 3519,1778 C34.1@3519,1541 3519,1499 ccw(c3566,1499) 3566,1452 4199.47,1452 ccw(c4199.47,1604.04) 4306.98,1496.53 4583.37,1772.92 ccw(c4526.32,1829.97) 4607,1829.97 v1(4607,1862) ; v1(3966,2702) v1(3991,2677) ; v1(4607,1612) 4607,1573.21 cw(c4519.57,1573.21) 4581.4,1511.4 4431,1361 C38.1@4399,1361 3394,1361 3341,1361 3227,1316 2785,1316 2697,1404 2312,1404
AES_Input_0: C44.1 C44.2 J8.1 R30.2 R31.1 R37.2 R58.2 | length 626.7
  Top Layer w10: J8.1@2562,1111 2829,1111 ccw(c2829,1148.34) 2855.4,1121.94 C44.1@2892,1158.54 ; R30.2@2892,1298 C44.2@2892,1225.46 2962.52,1251.96 R31.1@2962.78,1252.06 ; R31.1@2962.68,1252.54 R31.1@2962.78,1252.06 ; R37.2@2978.53,1178.32 2962.88,1251.58 R31.1@2962.78,1252.06
  Bottom Layer w15: J8.1@2577,1136 R58.2@2577,1190.54
AES_Output_0: J1.1 R4.2 | length 278.5
  Top Layer w15: R4.2@2495,3602.47 J1.1@2495,3881
AKM_AVdd: 
AKM_DVdd: 
AKM_ExtOsc: 
AKM_PDN: 
AKM_R: 
AKM_TVdd: 
AKM_VCom: 
CS_RCVR_96K: "U8.8 1A4" "U8.12 1Y4" "U9.16 SCL CCLK" D7.1 J6.9 R16.1 R16.2 | length 1835.7
  Top Layer w8: 3226,2033 3226,2077 3244,2095 3315,2095 3374,2154 3400.47,2154 R16.1@3448,2201.53 ; 4062.17,1865.43 3975.57,1865.43 3932,1909 3932,2186 3994,2248 4032,2248 4072,2288 4072,2358 4106,2392 4106,2423 4117,2434 D7.1@4150.53,2434
  Top Layer w10: v1(3735,1891.02) 3795.83,1891.02
  Top Layer w12: R16.2@3448,2268.47 J6.9@3448,2371
  Bottom Layer w8: v1(3295,2095) 3536,2095 3618,2013 3618,1971 3697.98,1891.02 v1(3735,1891.02)
CS_RCVR_/Audio: "U8.2 1A1" "U8.18 1Y1" "U9.15 AD1 CDIn" D10.1 J6.11 R17.1 R17.2 | length 1195.3
  Top Layer w8: 3252,2033 3303,2033 3388,2118 3464.47,2118 R17.1@3548,2201.53 ; 4062.17,2018.98 4010.02,2018.98 3991,2038 3991,2168 4019,2196 4064,2196 4092,2224 D10.1@4150.53,2224
  Top Layer w10: v1(3735,2044.57) 3795.83,2044.57
  Top Layer w12: R17.2@3548,2268.47 J6.11@3548,2371
  Bottom Layer w8: v1(3513,2171) 3608.57,2171 v1(3735,2044.57)
CS_RCVR_BCLK: "U9.27 OSCLK" J5.10 | length 872.9
  Top Layer w7: J5.10@2448,2471 2510,2533 2565,2533 2597,2501 2597,2327 2760,2164 2887.77,2164 2940,2111.77 2940,2033
CS_RCVR_CData: "U8.7 2Y2" "U8.13 2A2" "U9.19 GPO1" D5.1 J6.3 R13.1 R13.2 | length 2302.9
  Top Layer w8: 3148,2033 R13.1@3148,2201.53 ; 3795.83,1916.61 3839.61,1916.61 3890,1967 3890,2194 3980,2284 4010,2284 4035,2309 4035,2390.93 4063,2418.93 4063,2523 4114,2574 D5.1@4150.53,2574
  Top Layer w10: v1(4001.35,1891.02) 4062.17,1891.02
  Top Layer w12: R13.2@3148,2268.47 J6.3@3148,2371
  Bottom Layer w8: v1(3148,2167) 3224,2243 3647,2243 3809,2081 3809,1959 3848,1920 3945,1920 3973.98,1891.02 v1(4001.35,1891.02)
CS_RCVR_Data: "U9.26 SDOut" J5.14 | length 647.6
  Top Layer w7: J5.14@2648,2471 2666,2471 2696,2441 2696,2302 2794,2204 2909,2204 2966,2147 2966,2033
CS_RCVR_ERR: "U8.4 1A2" "U8.16 1Y2" "U9.14 AD0 /CS" D9.1 J6.13 R18.1 R18.2 | length 1737.7
  Top Layer w8: 3252,1805 3282,1805 3352,1735 3544,1735 3586.47,1777.46 v1(3586.47,2140) R18.1@3648,2201.53 ; 4062.17,1967.8 4006.2,1967.8 3972,2002 3972,2174 4011,2213 4054,2213 4110,2269 4110,2282 4122,2294 D9.1@4150.53,2294
  Top Layer w10: v1(3735,1993.39) 3795.83,1993.39
  Top Layer w12: R18.2@3648,2268.47 J6.13@3648,2371
  Bottom Layer w8: v1(3586.47,2140) 3599,2140 3694,2045 3694,2007 3707.61,1993.39 v1(3735,1993.39)
CS_RCVR_FILT: "U9.8 FILT" C29.2 C61.2 | length 247.5
  Top Layer w8: v1@3083,1728 3096,1744 ; 3096,1753 v1(3089,1722) ccw(c3101.32,1722) 3101.32,1709.68 3114.44,1709.68 ; 3096,1805 3096,1728.11 ccw(c3114.44,1728.11) 3114.44,1709.68 ; C29.2@3143.53,1709.68 3114.44,1709.68
  Top Layer w24: v1@3089,1721 v1@3089,1723
  Bottom Layer w25: v1(3089,1722) C61.2@3091.47,1747.54
CS_RCVR_OMCLK: "U9.25 OMCK" R21.2 | length 229.6
  Top Layer w8: R21.2@2822.47,1960 2961.9,1960 ccw(c2961.9,1990.1) 2992,1990.1 2992,2033
CS_RCVR_RCBL: "U8.6 1A3" "U8.14 1Y3" "U9.17 SDA CDOut" D8.1 J6.7 R15.1 R15.2 | length 1666.9
  Top Layer w8: 3200,2033 3200,2102 3232,2134 3307,2134 3348,2175 R15.1@3348,2201.53 ; 4062.17,1916.61 3974.39,1916.61 3952,1939 3952,2179 4003,2230 4041,2230 4090,2279 4090,2339 4115,2364 D8.1@4150.53,2364
  Top Layer w10: v1(3735,1942.2) 3795.83,1942.2
  Top Layer w12: R15.2@3348,2268.47 J6.7@3348,2371
  Bottom Layer w8: v1(3272,2134) 3539,2134 3661,2012 3661,1982 3700.8,1942.2 v1(3735,1942.2)
CS_RCVR_RMCLK: "U9.24 RMCK" J7.2 R23.1 R23.2 R25.2 | length 1498.9
  Top Layer w8: R25.2@1945.46,1698.25 2548.67,1698.25 ccw(c2548.67,1738.59) 2589,1738.59 2589,1816.73 cw(c2628.28,1816.73) 2600.5,1844.5 2644,1888 cw(c2672.97,1859.03) 2672.97,1900 ; R23.2@2535.47,1770 2589,1770 ; 2674,1900 2968,1900 ccw(c2968,1950) 3018,1950 3018,2033
  Top Layer w12: J7.2@2348,1770 R23.1@2468.53,1770
CS_RCVR_RST: "U9.9 /RST" C28.1 R24.1 R24.2 R27.2 SW2.1 | length 898
  Top Layer w8: 3122,1805 3122.19,1804.81 3122.19,1766.81 3143,1746 3272,1746 3327,1691 3620.53,1691 R24.1@3644.53,1715
  Top Layer w10: R24.1@3644.53,1715 C28.1@3644.53,1786 ; R24.2@3711.47,1715 SW2.1@3794,1715
  Top Layer w12: SW2.1@3794,1715 3843.53,1665.46 R27.2@3843.53,1593
CS_RCVR_RXN: "U9.5 RXN" C31.2 | length 119
  Top Layer w7: 3018,1805 3018,1701.14 C31.2@3028.68,1690.46
CS_RCVR_RXP0: "U9.4 RXP0" "U14.1 Out" C30.1 C30.2 R28.2 | length 285.7
  Top Layer w7: C30.2@2957.68,1690.46 2979.17,1711.96 ccw(c2948.2,1742.93) 2992,1742.93 2992,1805
  Top Layer w12: 2962.68,1464.69 C30.1@2962.68,1623.54
CS_RCVR_RXP1: 
CS_RCVR_RXP2: 
CS_RCVR_RXP3: 
CS_RCVR_RXSel0: 
CS_RCVR_RXSel1: 
CS_RCVR_TXSel0: 
CS_RCVR_TXSel1: 
CS_RCVR_TXThru: "U9.20 GPO0"
CS_RCVR_UData: "U8.9 2Y1" "U8.11 2A1" "U9.18 AD2 GPO2" D6.1 J6.5 R14.1 R14.2 | length 2263.5
  Top Layer w8: 3174,2033 3174,2127.53 R14.1@3248,2201.53 ; 3795.83,1865.43 3861.43,1865.43 3911,1915 3911,2190 3987,2266 4021,2266 4053,2298 4053,2373 4085,2405 4085,2479 4110,2504 D6.1@4150.53,2504
  Top Layer w10: v1(4001.35,1839.84) 4062.17,1839.84
  Top Layer w12: R14.2@3248,2268.47 J6.5@3248,2371
  Bottom Layer w8: v1(3212,2168) 3244,2168 3284,2208 3630,2208 3776,2062 3776,1934 3827,1883 3929,1883 3972.16,1839.84 v1(4001.35,1839.84)
CS_RCVR_VA: "U9.6 VA" C24.1 C59.2 L3.2 | length 530
  Top Layer w8: 3044,1805 v2@3044,1854
  Top Layer w10: v2(3042,1854) v2@3042,1859
  Top Layer w15: v2@3042,1859 cw(c3075,1859) 3075,1892 3263.44,1892 cw(c3263.44,1854.44) 3290,1881 3306.1,1864.9 ccw(c3330,1888.8) 3330,1855 C24.1@3375,1855
  Bottom Layer w12: C59.2@3024.53,1883 v2(3042,1854)
  Bottom Layer w20: C24.1@3375,1855 L3.2@3387.53,1778
CS_RCVR_WCLK: "U9.28 OLRCK" J5.12 | length 729.4
  Top Layer w7: J5.12@2548,2471 2498,2421 2498,2332 2699,2131 2867,2131 2914,2084 2914,2033
DIT_/Audio: "U2.22 /Audio" R42.2 SW3.7 | length 1028
  Top Layer w6: 3070,3394 3070,3355 3103,3322 3579.39,3322 3665,3407.61 3665,3489 3718,3542 SW3.7@3792,3542
  Top Layer w10: SW3.7@3792,3542 v1(3856,3542)
  Bottom Layer w10: v1(3856,3542) R42.2@3906.53,3542
DIT_BLS: "U2.52 BLS" "U8.5 2Y3" "U8.15 2A3" D4.1 J6.14 R11.1 R11.2 | length 3430.8
  Top Layer w7: 2992,3394 2992,3357 3015,3334 v1(3033,3334)
  Top Layer w8: 3795.83,1967.8 3837.8,1967.8 3870,2000 3870,2200 3971,2301 3995,2301 4017,2323 4017,2407.93 4041,2431.93 4041,2563 4098,2620 4136,2620 4150.53,2634.53 D4.1@4150.53,2784
  Top Layer w10: v1@3393,3156 3415,3134 3501,3134 3648,2987 v1(3648,2692) R11.1@3648,2640.47 ; v1(4001.35,1942.2) 4062.17,1942.2
  Top Layer w12: J6.14@3648,2471 R11.2@3648,2573.53
  Bottom Layer w8: v1(3033,3334) 3377,3334 cw(c3377,3318) 3393,3318 v1(3393,3159) ; v1(3648,2692) 3648,2573 3698,2523 3698,2252 3847,2103 3847,1994 3878,1963 3980.55,1963 v1(4001.35,1942.2)
DIT_CLK0: "U2.5 CLKJ0" R49.2 SW5.6 | length 933.5
  Top Layer w6: 3018,3166 3018,3207 3035,3224 3541,3224 3693,3072 v1(3708,3072)
  Top Layer w10: v1(3708,3072) SW5.6@3792,3072
  Bottom Layer w10: v1(3708,3072) R49.2@3756.53,3072
DIT_CLK1: "U2.4 CLK1" R48.2 SW5.5 | length 1018.8
  Top Layer w6: 2992,3166 2992,3211 3019,3238 3570,3238 3686,3122 SW5.5@3792,3122
  Top Layer w10: SW5.5@3792,3122 v1(3856,3122)
  Bottom Layer w10: v1(3856,3122) R48.2@3906.53,3122
DIT_Copy/C: "U2.2 COPY/C" R46.2 SW4.7 | length 1039.2
  Top Layer w6: 2940,3166 2940,3208 2998,3266 3679,3266 3695,3282 SW4.7@3792,3282
  Top Layer w10: SW4.7@3792,3282 v1(3856,3282)
  Bottom Layer w10: v1(3856,3282) R46.2@3906.53,3282
DIT_CSS: "U2.1 CSS" R45.2 SW4.6 | length 1020.5
  Top Layer w6: 2914,3166 2914,3209 2985,3280 3656,3280 v1(3708,3332)
  Top Layer w10: v1(3708,3332) SW4.6@3792,3332
  Bottom Layer w10: v1(3708,3332) R45.2@3756.53,3332
DIT_FMT0: 
DIT_FMT1: 
DIT_L: "U2.3 L" R47.2 SW4.8 | length 944.2
  Top Layer w6: 2966,3166 2966,3210 3008,3252 3618,3252 3638,3232 v1(3708,3232)
  Top Layer w10: v1(3708,3232) SW4.8@3792,3232
  Bottom Layer w10: v1(3708,3232) R47.2@3756.53,3232
DIT_M/S: "U2.14 M/S" R50.2 SW5.7 | length 744
  Top Layer w6: 3252,3166 3289,3166 3325,3202 3521,3202 3701,3022 SW5.7@3792,3022
  Top Layer w10: SW5.7@3792,3022 v1(3856,3022)
  Bottom Layer w10: v1(3856,3022) R50.2@3906.53,3022
DIT_MDAT: "U2.20 MDAT" R40.2 SW3.5 | length 1021.8
  Top Layer w6: 3122,3394 3122,3358 3130,3350 3552.39,3350 3626,3423.61 3626,3555 3713,3642 SW3.5@3792,3642
  Top Layer w10: SW3.5@3792,3642 v1(3856,3642)
  Bottom Layer w10: v1(3856,3642) R40.2@3906.53,3642
DIT_Mono: "U2.21 MONO" R41.2 SW3.6 | length 963.3
  Top Layer w6: 3096,3394 3096,3356 3116,3336 3565.39,3336 3645,3415.61 3645,3529 v1(3708,3592)
  Top Layer w10: v1(3708,3592) SW3.6@3792,3592
  Bottom Layer w10: v1(3708,3592) R41.2@3756.53,3592
DIT_RST: "U2.15 /RST" C1.1 R1.1 R1.2 R39.2 SW1.1 | length 981.5
  Top Layer w6: 3252,3394 3530,3394 3594,3458 3594,3733.47 R1.1@3644.53,3784
  Top Layer w10: R1.2@3711.47,3784 SW1.1@3794,3784 v1(3856,3784)
  Top Layer w12: R1.1@3644.53,3784 C1.1@3644.53,3855
  Bottom Layer w10: v1(3856,3784) R39.2@3906.53,3784
DIT_SPDIF_OUT_H: "U2.18 TX+" R6.1 R6.2 T1.1 | length 875.6
  Top Layer w7: 3174,3394 3174,3470.77 cw(c3207.23,3470.77) 3207.23,3504 3287,3504 ccw(c3287,3529.43) 3304.98,3511.45 R6.1@3325.53,3532 ; T1.1@3309,3669 3309,3741 cw(c3329,3741) 3329,3761 3467,3761 cw(c3467,3734) 3494,3734 3494,3524 cw(c3474,3524) 3474,3504 3426,3504 cw(c3426,3517.36) 3416.55,3507.91 R6.2@3392.47,3532
DIT_SPDIF_OUT_L: "U2.17 TX-" C7.1 C7.2 T1.2 | length 903.7
  Top Layer w7: 3200,3394 3200,3435 3189,3446 3189,3470 cw(c3208,3470) 3208,3489 3287,3489 cw(c3287,3463.57) 3304.98,3481.55 C7.1@3325.53,3461 ; T1.2@3309,3869 3309,3799 ccw(c3332,3799) 3332,3776 3467.62,3776 cw(c3467.62,3734.62) 3509,3734.62 3509,3523.18 cw(c3474.82,3523.18) 3474.82,3489 3426,3489 ccw(c3426,3475.64) 3416.55,3485.09 C7.2@3392.47,3461
DIT_U: "U2.27 U" R44.2 SW4.5 | length 1073.1
  Top Layer w6: 2940,3394 2940,3345 2991,3294 3625.2,3294 3713.2,3382 SW4.5@3792,3382
  Top Layer w10: SW4.5@3792,3382 v1(3856,3382)
  Bottom Layer w10: v1(3856,3382) R44.2@3906.53,3382
DIT_V: "U2.26 V" R43.2 SW3.8 | length 1053.7
  Top Layer w6: 2966,3394 2966,3348 3006,3308 3593,3308 3684,3399 3684,3468 v1(3708,3492)
  Top Layer w10: v1(3708,3492) SW3.8@3792,3492
  Bottom Layer w10: v1(3708,3492) R43.2@3756.53,3492
DIT_Vdd: "U2.19 Vdd" C9.1 C46.2 L4.2 L6.1 | length 1304.6
  Top Layer w8: 3148,3394 v1(3148,3450)
  Bottom Layer w12: C46.2@3148,3392 v1(3148,3450)
  Bottom Layer w15: L6.1@3158.47,3159 3268,3159 cw(c3268,3137) 3290,3137 3290,3089 ccw(c3317,3089) 3317,3062 3356,3062
  Bottom Layer w20: v1(3148,3450) 3148,3466.17 cw(c3171.83,3466.17) 3171.83,3490 3232,3490 cw(c3232,3427.23) 3276.38,3471.62 3361.39,3386.61 ccw(c3387,3412.21) 3387,3376 3415,3376 cw(c3415,3326) 3465,3326 3465,3124 cw(c3435,3124) 3435,3094 3372,3094 ccw(c3372,3078) 3356,3078 L4.2@3356,2916.47
DIT_Vio: "U2.7 Vio" "U2.9 FMT0" "U2.23 /Emph" "U2.24 BLSM" "U2.28 Mode" C48.2 L6.2 | length 1137.5
  Top Layer w7: v1(2888,3444) 2914,3444 ; 2914,3394 2914,3444 ; 3018,3394 3018,3444 ; 3044,3394 3044,3438 ccw(c3038,3438) 3038,3444 3018,3444 ; 2914,3444 3018,3444
  Top Layer w8: 3070,3114 3070,3166 3070,3186 ; v1(3122,3120) 3122,3166
  Bottom Layer w8: v1(3065,3104) cw(c3103.63,3065.37) 3103.63,3120 v1(3122,3120)
  Bottom Layer w10: v1(2888,3444) 2875,3444 ccw(c2875,3428) 2859,3428 2859,3171 ccw(c2906,3171) 2906,3124 3052,3124 ; C48.2@3052.53,3078 3052.53,3124 3052.53,3138.11 cw(c3073.43,3138.11) 3073.43,3159 L6.2@3091.53,3159
  Bottom Layer w20: C48.2@3052.53,3078 v1(3065,3104)